# Altium PCB STLINKV3_Adapter.PcbDoc
Units mm, origin at the board's own origin, x right, y up, seen from the top; angles counter-clockwise.
Board outline 32 x 48.6 mm, 2 copper layers (Top Layer, Bottom Layer), stack 1.569 mm thick; 8 components, 25 nets, 67 pads, 83 vias.
Unrouted connection lines stored in the file: 10.
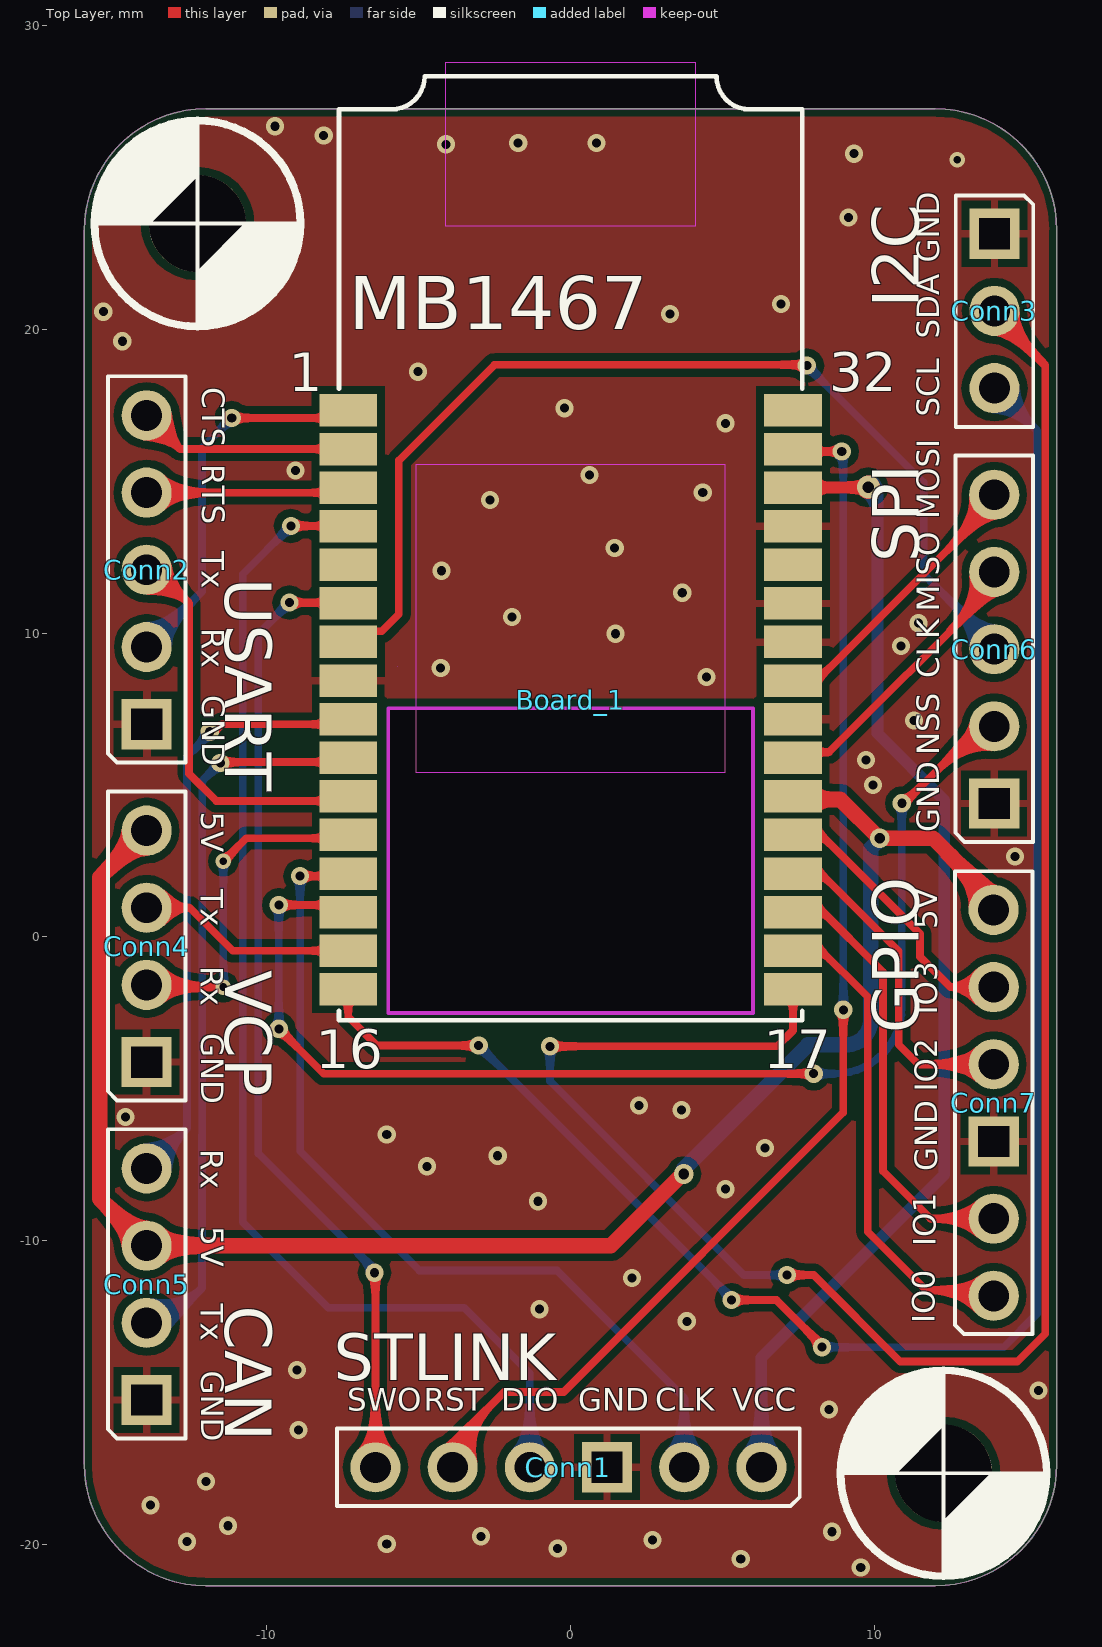
[diagram p0: Top Layer view]
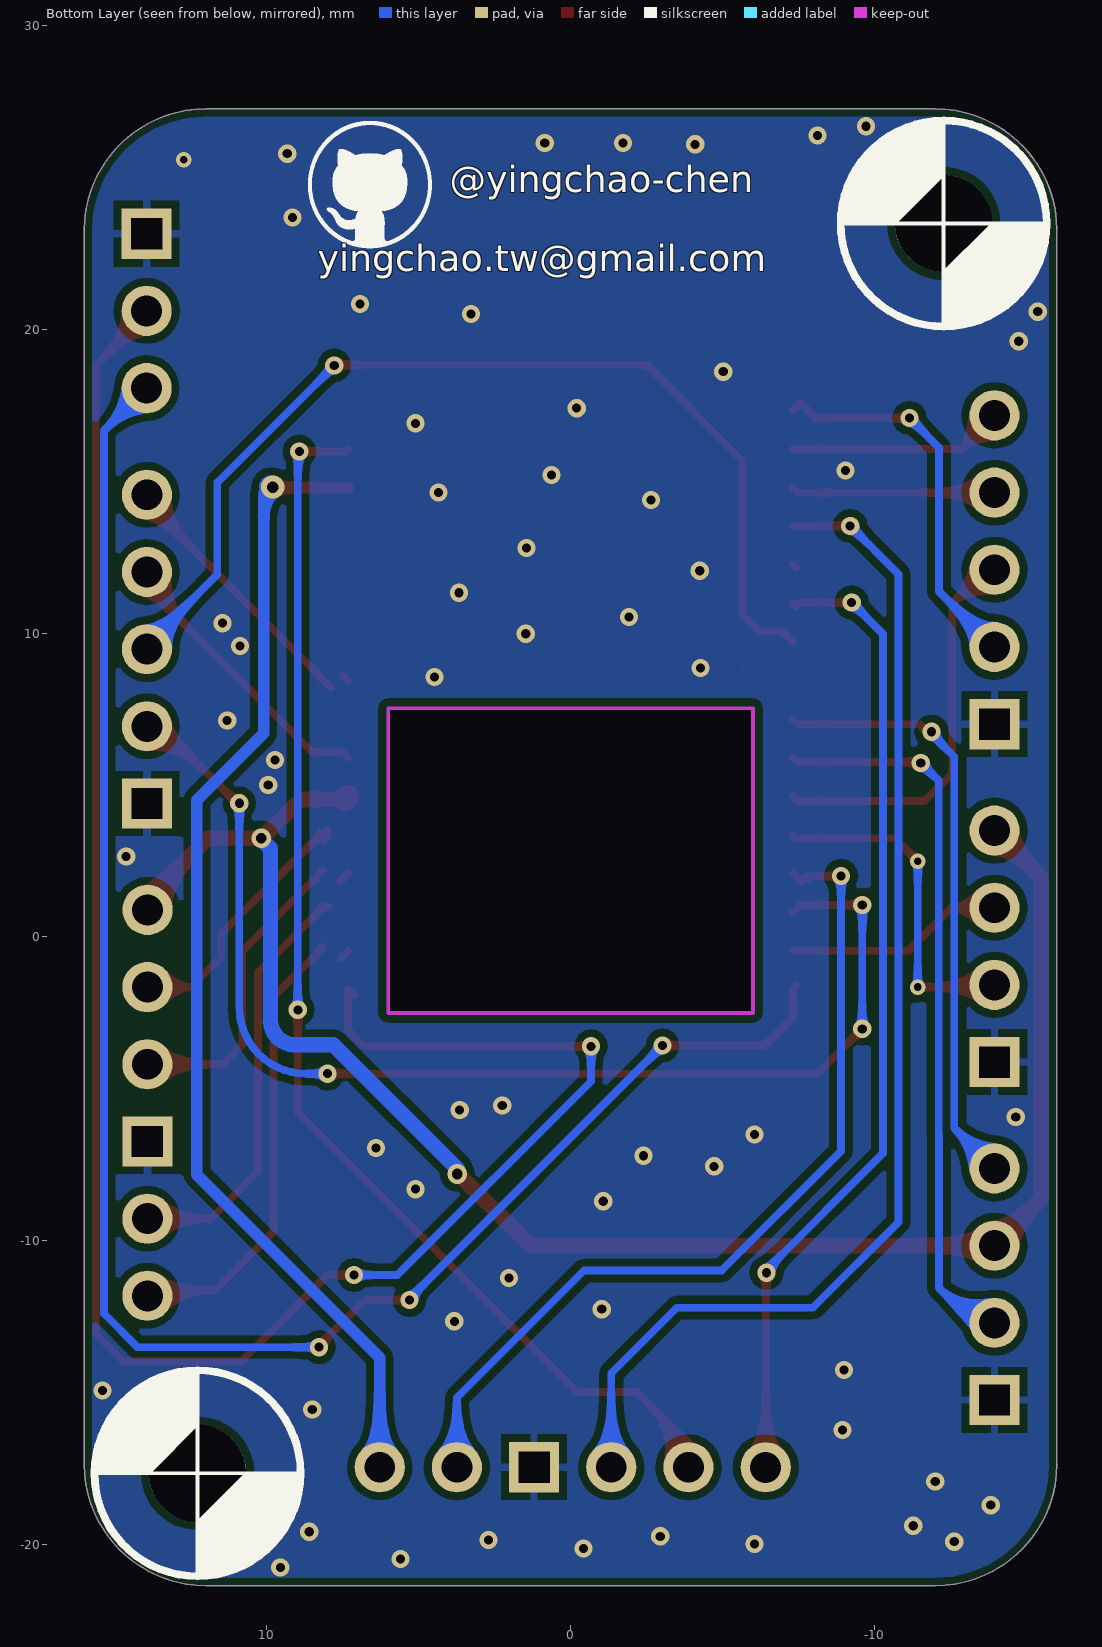
[diagram p1: Bottom Layer view, seen from below]
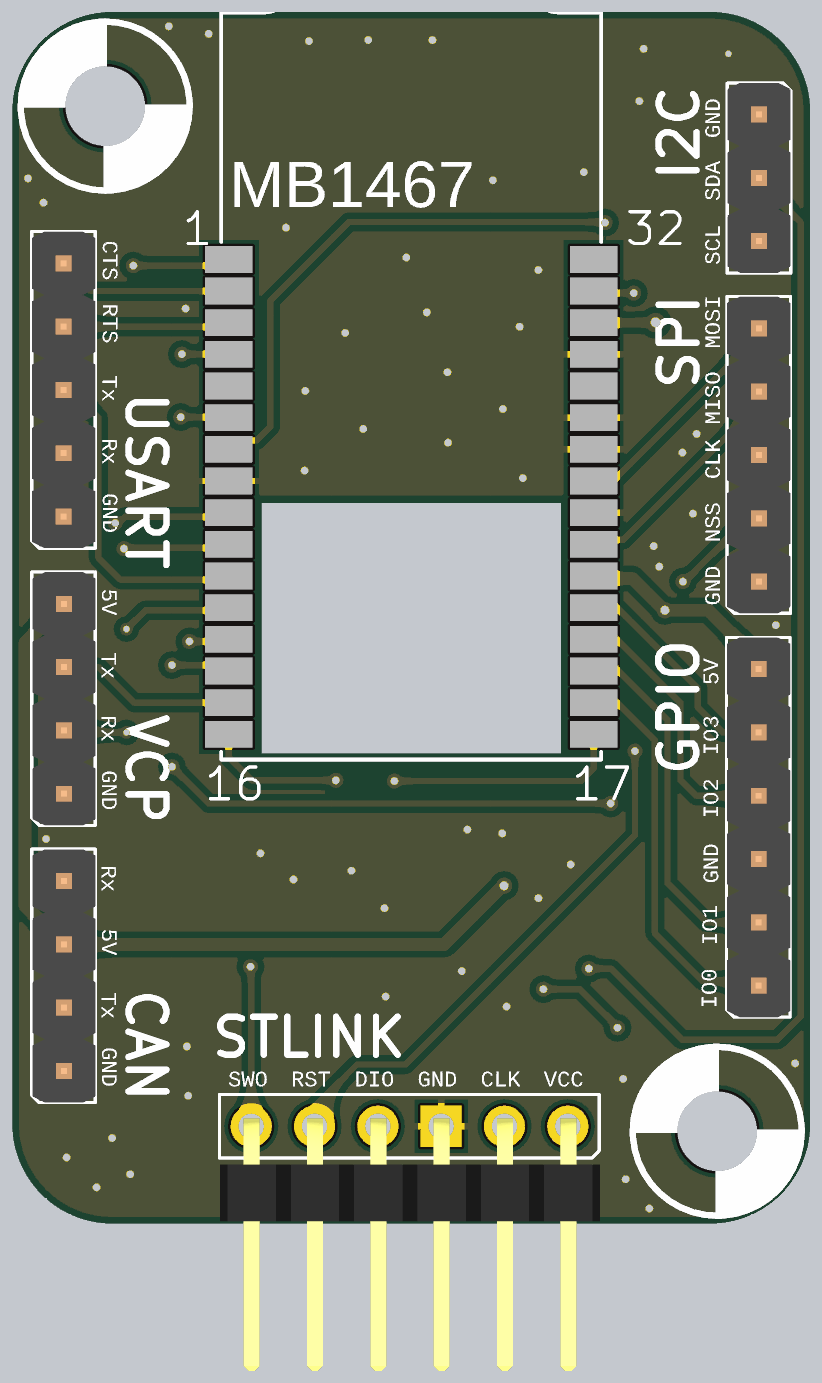
[diagram p2: 3D render of the assembled board from above, using the file's embedded part models]

## Layer stack, top to bottom
Top Solder: solder mask 0.0254, SM-001, Dk 4
Top Layer: signal copper 0.035
Dielectric 1: core 1.4986, Core-043, Dk 4.3
Bottom Layer: signal copper 0.035
Bottom Solder: solder mask 0.0254, SM-001, Dk 4

## Board outline
-16.002,-17.35 ccw(c-12.002,-17.35) -12.002,-21.35 12.002,-21.35 ccw(c12.002,-17.35) 16.002,-17.35 16.002,23.25 ccw(c12.002,23.25) 12.002,27.25 -12.002,27.25 ccw(c-12.002,23.25) -16.002,23.25
cut-out: -6,7.55 -6,-2.5 6,-2.5 6,7.55
cut-out: -5.7,8.9

## Design rules (kind name [scope] priority, off if disabled: settings)
Clearance [All] p1: gap=0.254 ignorepadtopadclearanceinfootprint=FALSE except(0.127: SMDPad-SMDPad)
ComponentClearance [All] p1: gap=0 collisioncheckmode=3 verticalgap=0 showdistances=FALSE
HoleSize [All] p1: absolutevalues=TRUE maxlimit=3.81 minlimit=0.025 maxpercent=80.000 minpercent=20.000
PolygonConnect Polygon-via [IsVia] p1: connectstyle=Direct reliefconductorwidth=0.254 reliefentries=4 polygonreliefangle="90 Angle" airgapwidth=0.254
PolygonConnect [All] p2: connectstyle=Relief reliefconductorwidth=0.254 reliefentries=4 polygonreliefangle="90 Angle" airgapwidth=0.254
RoutingVias [All] p1: holewidth=0.711 width=1.27 viastyle="Through Hole" minholewidth=0.254 minwidth=0.508 maxholewidth=0.711 maxwidth=1.27
SilkToSilkClearance [All] p1: silktosilkclearance=0.025
SilkToSolderMaskClearance [IsPad] p1: minsilkscreentomaskgap=0 clearancetoexposedcopper=TRUE
SolderMaskExpansion [All] p1: expansion=0.102 istentingtop=FALSE
Width [All] p1: maxlimit=1.27 minlimit=0.127 preferedwidth=0.254
26 further rules are at their usual default settings.

## Components (designator, comment, footprint, x,y, rotation, side; value= is the part's Value field where it differs from the comment)
Board_1 "MB1467" MB1467 0,7.8 r0 top locked
Conn1 "STLINK" CONNECT_6P_90 -0.05,-17.135 r180 top locked
Conn2 "USART" CONNECT_5P -13.94,12.07 r90 top
Conn3 "I2C" CONNECT_3P 13.95,20.6 r270 top
Conn4 "VCP" CONNECT_4P -13.93,-0.3 r90 top
Conn5 "CAN" CONNECT_4P -13.93,-11.42 r90 top
Conn6 "SPI" CONNECT_5P 13.95,9.459 r90 top
Conn7 "GPIO" CONNECT_6P 13.94,-5.461 r90 top

## Footprints (in the part's own frame and the unit in brackets; to place one, negate y for a bottom-side part, rotate by r counter-clockwise, add the part's x,y. Pads: shape width x height; smd on the part's side, far side on the other; paste and mask are expansions set on the pad)
CONNECT_3P [mil]
  rect 65x65 hole 40 square: 1(-100,0)
  round 65 hole 40: 2(0,0) 3(100,0)
  silkscreen extent -150,-50 151,50, body extent -150,-50 150,50, height 338
CONNECT_4P [mil]
  rect 65x65 hole 40 square: 1(-150.39,0.79)
  round 65 hole 40: 2(-50.39,0.79) 3(49.61,0.79) 4(149.61,0.79)
  silkscreen extent -200,-49 200,51, body extent -200,-50 200,50, height 338
CONNECT_5P [mil]
  rect 65x65 hole 40 square: 1(-199.61,0.39)
  round 65 hole 40: 2(-99.61,0.39) 3(0.39,0.39) 4(100.39,0.39) 5(200.39,0.39)
  silkscreen extent -249,-50 251,51, body extent -249,-50 251,50, height 338
CONNECT_6P [mil]
  round 65 hole 40: 1(-250,0.59) 2(-150,0.59) 4(50,0.59) 5(150,0.59) 6(250,0.79)
  rect 65x65 hole 40 square: 3(-50,0.59)
  silkscreen extent -300,-50 300,51, body extent -300,-50 300,50, height 286
CONNECT_6P_90 [mil]
  round 65 hole 40: 1(-249.21,12.4) 2(-149.21,12.4) 4(50.79,12.4) 5(150.79,12.4) 6(250.79,12.6)
  rect 65x65 hole 40 square: 3(-49.21,12.4)
  silkscreen extent -299,-38 301,63, body extent -300,0 300,399, height 99
MB1467 [mm] "ST-LINK-v3-mini"
  rect 1.9x1.07 smd: 1(-7.32,9.525) 2(-7.32,8.255) 3(-7.32,6.985) 4(-7.32,5.715) 5(-7.32,4.445) 6(-7.32,3.175) 7(-7.32,1.905) 8(-7.32,0.635) 9(-7.32,-0.635) 10(-7.32,-1.905) 11(-7.32,-3.175) 12(-7.32,-4.445) 13(-7.32,-5.715) 14(-7.32,-6.985) 15(-7.32,-8.255) 16(-7.32,-9.525) 17(7.32,-9.525) 18(7.32,-8.255) 19(7.32,-6.985) 20(7.32,-5.715) 21(7.32,-4.445) 22(7.32,-3.175) 23(7.32,-1.905) 24(7.32,-0.635) 25(7.32,0.635) 26(7.32,1.905) 27(7.32,3.175) 28(7.32,4.445) 29(7.32,5.715) 30(7.32,6.985) 31(7.32,8.255) 32(7.32,9.525)
  Top Layer keep-out region: -5.075,-2.394 -5.075,7.756 5.075,7.756 5.075,-2.394 -5.075,-2.394
  Top Layer keep-out region: -4.1,15.581 -4.1,20.981 4.1,20.981 4.1,15.581 -4.1,15.581
  silkscreen extent -7.62,-10.54 7.62,20.52

## Part data
Conn1 Conn7: library part CONN_06, "Header, 6-Pin", DeviceName=SILK_FEMALE_PTH, DeviceSetName=CONN_06, GateName_1=G$1, LibraryName=SparkFun-Connectors, PROD_ID=CONN-08437, SymbolName_1=CONN_06
Conn2 Conn6: library part CONN_05, "Header, 5-Pin", DeviceSetName=CONN_05, GateName_1=G$1, LibraryName=SparkFun-Connectors, SymbolName_1=CONN_05
Conn3: library part CONN_03, "Header, 3-Pin"
Conn4 Conn5: library part CONN_04, "Header, 4-Pin", DeviceSetName=CONN_04, GateName_1=G$1, LibraryName=SparkFun-Connectors, PROD_ID=CONN-09696, SymbolName_1=CONN_04

## Free pads (board coordinates)
  round 3.2 hole 3.2 unplated: ""(-12.277,23.475) ""(12.275,-17.65)

## Via types
v1: diameter 0.6, hole 0.3, Top Layer to Bottom Layer, tented both sides, 77 vias
v2: diameter 0.508, hole 0.254, Top Layer to Bottom Layer, tented both sides, 3 vias
v3: diameter 0.65, hole 0.35, Top Layer to Bottom Layer, tented both sides, 2 vias
v4: diameter 0.762, hole 0.381, Top Layer to Bottom Layer, tented both sides, 1 vias

## Nets (pads, with @x,y where several pads share a name; then routed paths per layer and width w, separated by ;. In a path a pad name is that pad's centre, name@x,y a point inside that pad or via, vN(x,y) a via of type N, cw(c..) or ccw(c..) an arc to the next point about the centre after c; other vN are vias at no path point)
5V: Board_1.22 Conn4.4 Conn5.3 Conn7.6 | length 56.5
  Top Layer w0.508: Conn4.4 -15.494,1.956 -15.494,-8.616 Conn5.3 1.327,-10.16 3.687,-7.8 v3(3.725,-7.8) ; Board_1.22@7.42,4.525 8.875,4.525 10.15,3.25 v3(10.175,3.25) 11.925,3.25 Conn7.6@13.93,1.245
  Top Layer w0.762: Board_1.22 Board_1.22@7.42,4.525 ; Conn7.6@13.93,0.889 Conn7.6@13.93,1.245
  Bottom Layer w0.508: v3(3.725,-7.8) 3.725,-7.632 7.807,-3.55 9.129,-3.55 ccw(c9.056,-2.731) 9.875,-2.658 9.875,2.912 10.175,3.212 v3(10.175,3.25)
CAN_Rx: Board_1.9 Conn5.4 | length 20
  Top Layer w0.254: v1(-11.875,6.75) -11.731,6.75 -11.481,7 -7.485,7 Board_1.9
  Bottom Layer w0.254: Conn5.4 -12.625,-6.295 -12.625,5.925 -11.875,6.675 v1(-11.875,6.75)
CAN_Tx: Board_1.10 Conn5.2 | length 24
  Top Layer w0.254: v1@-11.525,5.756 -7.469,5.756 -7.325,5.9 Board_1.10
  Bottom Layer w0.254: Conn5.2 Conn5.2@-13.688,-12.438 ; Conn5.2@-13.475,-12.775 -13.35,-12.775 -12.125,-11.55 -12.125,-6.513 -12.117,-6.505 -12.117,5.133 v1(-11.525,5.725)
GND: Board_1.8 Board_1.24 Board_1.26 Board_1.27 Board_1.29 Conn1.3 Conn2.1 Conn3.1 Conn4.1 Conn5.1 Conn6.1 Conn7.3
  other v1: 9.55,-20.75 5.6,-20.475 -0.425,-20.125 -6.05,-19.975 -12.625,-19.9 2.7,-19.85 -2.95,-19.725 8.6,-19.575 -11.275,-19.375 -13.825,-18.7 -12,-17.925 -8.95,-16.225 8.5,-15.55 15.4,-14.925 -9,-14.25 3.825,-12.65 -1.025,-12.25 2.025,-11.225 -1.075,-8.7 5.1,-8.3 -4.725,-7.55 -2.4,-7.2 6.4,-6.95 -6.05,-6.5 -14.65,-5.925 3.65,-5.7 2.25,-5.55 14.625,2.65 9.95,5 9.725,5.825 11.3,7.125 4.475,8.55 -4.275,8.85 10.875,9.575 1.475,9.975 11.45,10.325 -1.925,10.525 3.675,11.325 -4.25,12.05 1.45,12.8 -2.65,14.375 4.35,14.625 0.625,15.2 -9.05,15.35 5.1,16.9 -0.2,17.4 -5.025,18.6 -14.75,19.6 3.275,20.5 -15.375,20.575 6.925,20.825 9.15,23.675 9.325,25.775 -4.1,26.081 -1.725,26.125 0.85,26.125 -8.125,26.375 -9.725,26.675
  other v2: 12.725,25.575
GPIO0: Board_1.18 Conn7.1 | length 15.4
  Top Layer w0.254: Board_1.18 Board_1.18@7.567,-0.702 ; Board_1.18@8.137,-0.337 9.775,-1.975 9.775,-9.7 11.7,-11.625 13.749,-11.625 Conn7.1@13.935,-11.811
GPIO1: Board_1.19 Conn7.2 | length 14.1
  Top Layer w0.254: Board_1.19@7.95,1 8.125,1 10.283,-1.158 10.283,-7.708 11.846,-9.271 Conn7.2
GPIO2: Board_1.20 Conn7.4 | length 10.6
  Top Layer w0.254: Board_1.20 Board_1.20@7.582,1.823 ; Board_1.20@8.15,2.175 10.8,-0.475 10.8,-3.551 11.44,-4.191 Conn7.4
GPIO3: Board_1.21 Conn7.5 | length 8.9
  Top Layer w0.254: Board_1.21@8,3.525 Board_1.21@8,3.42 ; Board_1.21@8.143,3.173 8,3.316 Board_1.21@8,3.42 ; Conn7.5 12.501,-1.651 11.5,-0.65 11.5,0.1 8.18,3.42 Board_1.21@8,3.42
I2C_SCL: Board_1.16 Conn3.3 | length 59.8
  Top Layer w0.254: Board_1.16@-7.445,-1.6 Board_1.16 -7.32,-2.63 -6.375,-3.575 v1(-3.025,-3.575) ; v1(5.3,-11.95) 6.775,-11.95 8.275,-13.45 v1(8.275,-13.5)
  Bottom Layer w0.254: v1(-3.025,-3.575) 5.3,-11.9 v1(5.3,-11.95) ; v1(8.275,-13.5) 14.25,-13.5 15.35,-12.4 15.35,16.66 Conn3.3
I2C_SDA: Board_1.17 Conn3.2 | length 65.8
  Top Layer w0.254: v1(-0.675,-3.6) 6.8,-3.6 7.32,-3.08 Board_1.17 Board_1.17@7.133,-1.912 ; v1(7.125,-11.125) 8,-11.125 10.85,-13.975 14.7,-13.975 15.621,-13.054 15.621,18.804 13.95,20.475 Conn3.2
  Bottom Layer w0.254: v1(-0.675,-3.6) -0.675,-4.75 5.7,-11.125 v1(7.125,-11.125)
SPI_CLK: Board_1.7 Conn6.3 | length 33.7
  Top Layer w0.254: Board_1.7 -6.966,10.059 -6.212,10.059 -5.65,10.621 -5.65,15.675 -2.5,18.825 7.75,18.825 v1(7.775,18.8)
  Bottom Layer w0.254: v1(7.775,18.8) 11.625,14.95 11.625,11.925 13.94,9.61 Conn6.3
SPI_MISO: Board_1.23 Conn6.4 | length 9.4
  Top Layer w0.254: Board_1.23 7.502,6.077 8.502,6.077 13.673,11.248 13.673,11.742 Conn6.4
SPI_MOSI: Board_1.25 Conn6.5 | length 9.1
  Top Layer w0.254: Board_1.25 Board_1.25@7.483,8.598 ; Board_1.25@7.875,8.2 13.94,14.265 Conn6.5
SPI_NSS: Board_1.14 Conn6.2 | length 39.6
  Top Layer w0.254: v1(-9.6,-3.025) -8.125,-4.5 v1(8,-4.5) ; v1(-9.6,1.05) -7.555,1.05 Board_1.14 ; v1(10.9,4.4) 10.975,4.4 Conn6.2@13.533,6.958 ; Conn6.2@13.562,6.929 Conn6.2
  Bottom Layer w0.254: v1(-9.6,-3.025) v1(-9.6,1.05) ; v1(8,-4.5) 8.715,-4.5 ccw(c8.715,-2.315) 10.9,-2.315 v1(10.9,4.4)
T_NRST: Board_1.31 Conn1.5 | length 41.2
  Top Layer w0.254: Conn1.5@-3.952,-16.748 -2.179,-14.975 -0.225,-14.975 8.975,-5.775 v1(8.975,-2.4) ; Conn1.5 Conn1.5@-3.668,-17.238 ; Board_1.31 7.4,15.975 v1(8.925,15.975)
  Bottom Layer w0.254: v1(8.925,15.975) 8.975,15.925 v1(8.975,-2.4)
T_SWCLK: Board_1.13 Conn1.2 | length 29.2
  Top Layer w0.254: v1(-8.9,2) -7.92,2 -7.82,1.9 -7.745,1.975 -7.588,1.817 Board_1.13
  Bottom Layer w0.254: v1(-8.9,2) -8.9,-7.05 -4.975,-10.975 -0.45,-10.975 3.74,-15.165 Conn1.2
T_SWDIO: Board_1.4 Conn1.4 | length 40.1
  Top Layer w0.254: v1(-9.2,13.525) -7.33,13.525 Board_1.4
  Bottom Layer w0.254: v1(-9.2,13.525) -10.79,11.935 -10.79,-9.385 -7.975,-12.2 -3.5,-12.2 -1.34,-14.36 Conn1.4
T_SWO: Board_1.6 Conn1.6 | length 32.5
  Top Layer w0.254: v1(-9.25,11) -7.545,11 -7.42,10.875 Board_1.6 ; v1(-6.45,-11.05) -6.42,-11.08 Conn1.6
  Bottom Layer w0.254: v1(-9.25,11) -10.282,9.968 -10.282,-7.124 -6.45,-10.956 v1(-6.45,-11.05)
T_VCC: Board_1.30 Conn1.1 | length 38.3
  Top Layer w0.381: Board_1.30 v4@9.785,14.785
  Top Layer w0.762: v4@9.785,14.785 v4(9.8,14.8)
  Bottom Layer w0.381: Conn1.1 6.28,-13.845 12.3,-7.825 12.3,4.5 10.1,6.7 10.1,14.575 v4@9.875,14.8
  Bottom Layer w0.762: v4(9.8,14.8) v4@9.875,14.8
UART_CTS: Board_1.2 Conn2.5 | length 7.1
  Top Layer w0.254: Conn2.5 -12.845,16.055 Board_1.2
UART_RTS: Board_1.3 Conn2.4 | length 6.7
  Top Layer w0.254: Conn2.4 -7.485,14.62 Board_1.3
UART_Rx: Board_1.1 Conn2.2 | length 12.8
  Top Layer w0.254: v1(-11.15,17.075) -8.07,17.075 -7.57,17.575 Board_1.1
  Bottom Layer w0.254: Conn2.2 -12.125,11.365 -12.125,16.1 v1(-11.15,17.075)
UART_Tx: Board_1.11 Conn2.3 | length 13.1
  Top Layer w0.254: Conn2.3 -13.655,12.08 -12.556,10.981 -12.556,5.374 -11.657,4.475 -7.47,4.475 Board_1.11
VCP_Rx: Board_1.15 Conn4.3 | length 7.2
  Top Layer w0.254: Conn4.3 -12.535,0.96 -11.12,-0.455 Board_1.15 Board_1.15@-7.325,-0.45
VCP_Tx: Board_1.12 Conn4.2 | length 11.2
  Top Layer w0.254: Conn4.2 -13.88,-1.65 v2(-11.425,-1.65) ; v2(-11.425,2.494) -10.669,3.25 -7.425,3.25 Board_1.12
  Bottom Layer w0.254: v2(-11.425,-1.65) v2(-11.425,2.494)
pads on no net: Board_1.5 Board_1.28 Board_1.32
copper on no net: | length 0.1
  Top Layer w0.254: -7.415,12.15 -7.32,12.245

## Polygon pours and split planes (outlines as drawn)
GND on Top Layer "GND_L01_P003" (solid, remove dead copper, pour order 3): -16.002,-21.35 16.002,-21.35 16.002,27.25 -16.002,27.25
no net on Top Layer "NONET_L01_P001" (solid, pour order 1): 23.4,-5.1
no net on Top Layer "NONET_L01_P000" (solid, pour order 0): 22.4,-2.8
GND on Bottom Layer "GND_L02_P002" (solid, remove dead copper, pour order 2): -16.002,-21.35 16.002,-21.35 16.002,27.25 -16.002,27.25

## Keep-outs
Keep-Out Layer:
  lines w0: -16.002,-17.35 ccw(c-12.002,-17.35) -12.002,-21.35 0,-21.35 12.002,-21.35 ccw(c12.002,-17.35) 16.002,-17.35 16.002,23.25 ccw(c12.002,23.25) 12.002,27.25 0,27.25 -12.002,27.25 ccw(c-12.002,23.25) -16.002,23.25 -16.002,-17.35
  lines w0.127: -6,-2.5 -6,7.525 6,7.525 6,-2.5 0,-2.5 -6,-2.5

## Silkscreen, mask and mechanical layers (free items; w line width, h text height)
Top Overlay:
  region: 8.885,-17.65 8.885,-17.336 cw(c11.411,-17.336) 9.625,-15.55 10.361,-14.814 cw(c11.987,-16.847) 12.275,-14.26 cw(c12.239,-14.225) 12.239,-14.275 ccw(c12.239,-14.224) 12.275,-14.26 12.275,-16.025 cw(c12.094,-16.025) 12.222,-16.153 10.7,-17.675
  region: 15.665,-17.65 15.665,-17.964 cw(c13.139,-17.964) 14.925,-19.75 14.189,-20.486 cw(c12.563,-18.453) 12.275,-21.04 cw(c12.311,-21.075) 12.311,-21.025 ccw(c12.311,-21.076) 12.275,-21.04 12.275,-19.275 cw(c12.456,-19.275) 12.328,-19.147 13.85,-17.625
  region: -8.887,23.475 -8.887,23.161 cw(c-11.413,23.161) -9.627,21.375 -10.363,20.639 cw(c-11.989,22.672) -12.277,20.085 cw(c-12.241,20.05) -12.241,20.1 ccw(c-12.241,20.049) -12.277,20.085 -12.277,21.85 cw(c-12.096,21.85) -12.224,21.978 -10.702,23.5
  region: -15.667,23.475 -15.667,23.789 cw(c-13.141,23.789) -14.927,25.575 -14.191,26.311 cw(c-12.566,24.278) -12.277,26.865 cw(c-12.313,26.9) -12.313,26.85 ccw(c-12.313,26.901) -12.277,26.865 -12.277,25.1 cw(c-12.458,25.1) -12.33,24.972 -13.852,23.45
  region: 12.375,-14.36
  region: 24.625,-15.95
  lines w0.127: -15.667,23.475 -8.887,23.475 ; -12.277,20.085 -12.277,26.865 ; 8.885,-17.65 15.665,-17.65 ; 12.275,-21.04 12.275,-14.26
  lines w0.254: -15.667,23.475 ccw(c-12.277,23.475) -12.277,20.085 ccw(c-12.277,23.475) -8.887,23.475 ccw(c-12.277,23.475) -12.277,26.865 ccw(c-12.277,23.475) -15.667,23.475 ; 8.885,-17.65 cw(c12.275,-17.65) 12.275,-14.26 cw(c12.275,-17.65) 15.665,-17.65 cw(c12.275,-17.65) 12.275,-21.04 cw(c12.275,-17.65) 8.885,-17.65
  text "GND" at 12.382,22.191 h1.27 r90
  text "SDA" at 12.382,19.675 h1.27 r90
  text "CTS" at -12.372,18.082 h1.27 r270
  text "SCL" at 12.382,17.111 h1.27 r90
  text "RTS" at -12.372,15.552 h1.27 r270
  text "MOSI" at 12.382,13.75 h1.27 r90
  text "Tx" at -12.39,12.684 h1.27 r270
  text "MISO" at 12.382,10.7 h1.27 r90
  text "Rx" at -12.39,10.16 h1.27 r270
  text "CLK" at 12.382,8.511 h1.27 r90
  text "GND" at -12.372,7.949 h1.27 r270
  text "NSS" at 12.382,5.984 h1.27 r90
  text "5V" at -12.405,4.111 h1.27 r270
  text "GND" at 12.382,3.44 h1.27 r90
  text "Tx" at -12.422,1.564 h1.27 r270
  text "5V" at 12.314,0.254 h1.27 r90
  text "Rx" at -12.422,-0.96 h1.27 r270
  text "IO3" at 12.312,-2.563 h1.27 r90
  text "GND" at -12.404,-3.171 h1.27 r270
  text "IO2" at 12.312,-5.092 h1.27 r90
  text "Rx" at -12.422,-6.98 h1.27 r270
  text "GND" at 12.312,-7.704 h1.27 r90
  text "5V" at -12.405,-9.529 h1.27 r270
  text "IO1" at 12.262,-10.176 h1.27 r90
  text "Tx" at -12.422,-12.076 h1.27 r270
  text "IO0" at 12.237,-12.716 h1.27 r90
  text "GND" at -12.404,-14.271 h1.27 r270
  text "SWO" at -7.349,-15.847 h1.27
  text "RST" at -4.823,-15.847 h1.27
  text "DIO" at -2.276,-15.847 h1.27
  text "GND" at 0.251,-15.847 h1.27
  text "CLK" at 2.782,-15.847 h1.27
  text "VCC" at 5.317,-15.847 h1.27
Bottom Overlay:
  drawing of 2329 lines, arcs and shapes, not listed
  text "@yingchao-chen" at 3.975,24.201 h1.5
  text "yingchao.tw@gmail.com" at 8.325,21.601 h1.5

## Dimensions
16.002,23.25 to -16.002,23.25 on Mechanical 3
12.002,27.25 to 12.002,-21.35 on Mechanical 3

## Text inside footprints (layer, text, board x,y; h text height)
Board_1: Top Overlay "17" at 6.35,-4.318 h1.27; Top Overlay "16" at -8.382,-4.318 h1.27; Top Overlay "1" at -9.271,17.96 h1.27; Top Overlay "32" at 8.509,17.96 h1.27